# Altium PCB 5GHz.PcbDoc
Units mm, origin at the board's own origin, x right, y up, seen from the top; angles counter-clockwise.
Board outline 60.32 x 29.08 mm, 2 copper layers (Top Layer, Bottom Layer); 19 components, 17 nets, 72 pads, 0 vias.
Unrouted connection lines stored in the file: 1.
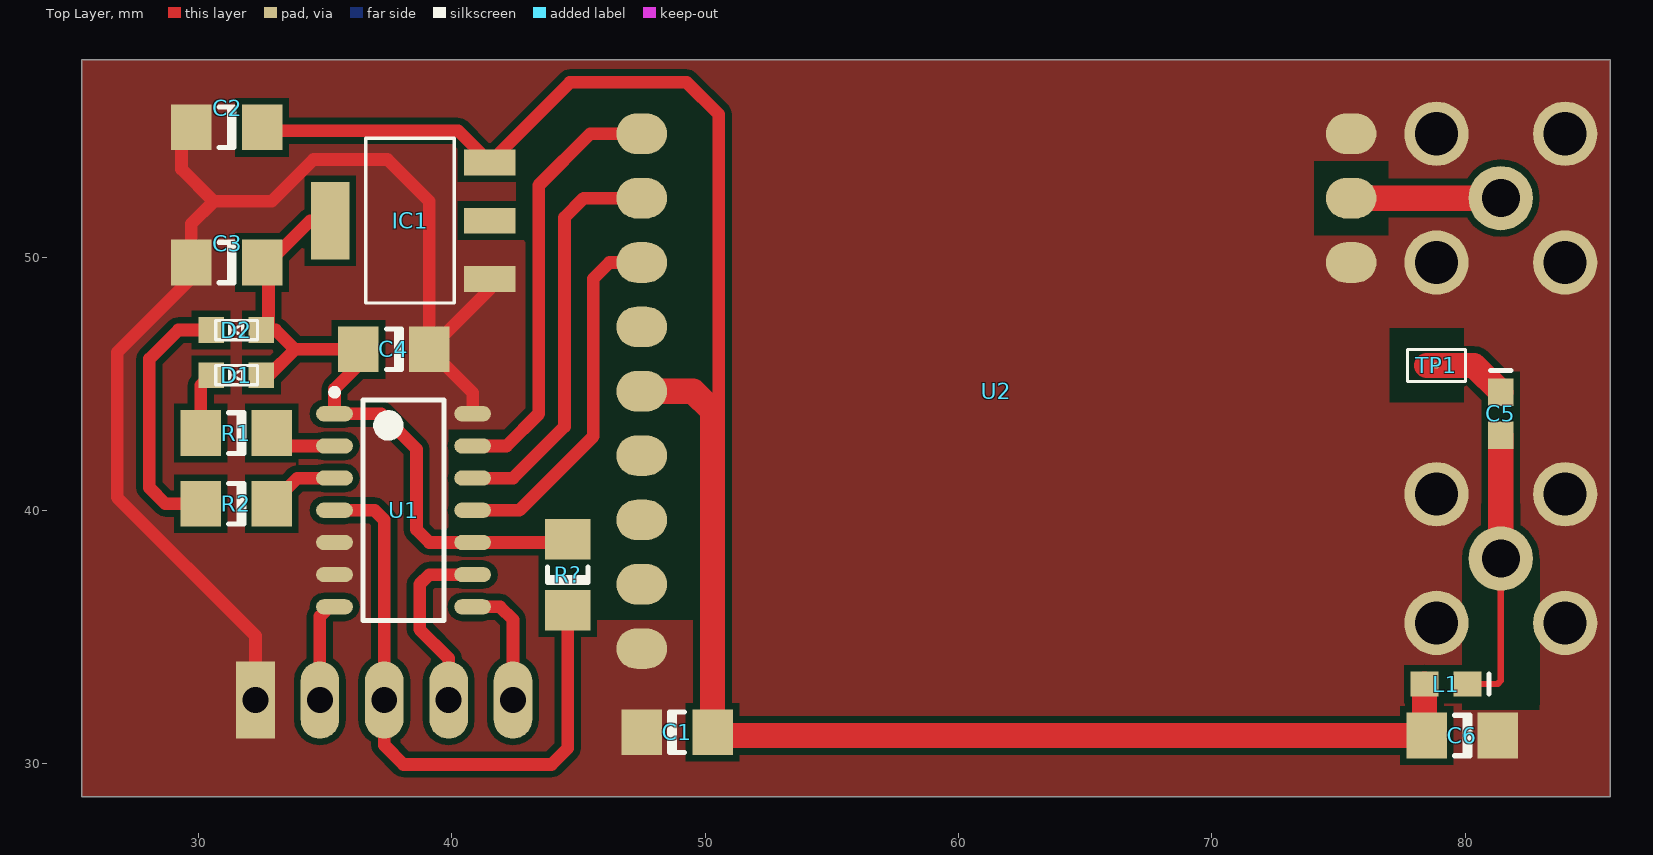
[diagram p0: Top Layer view]
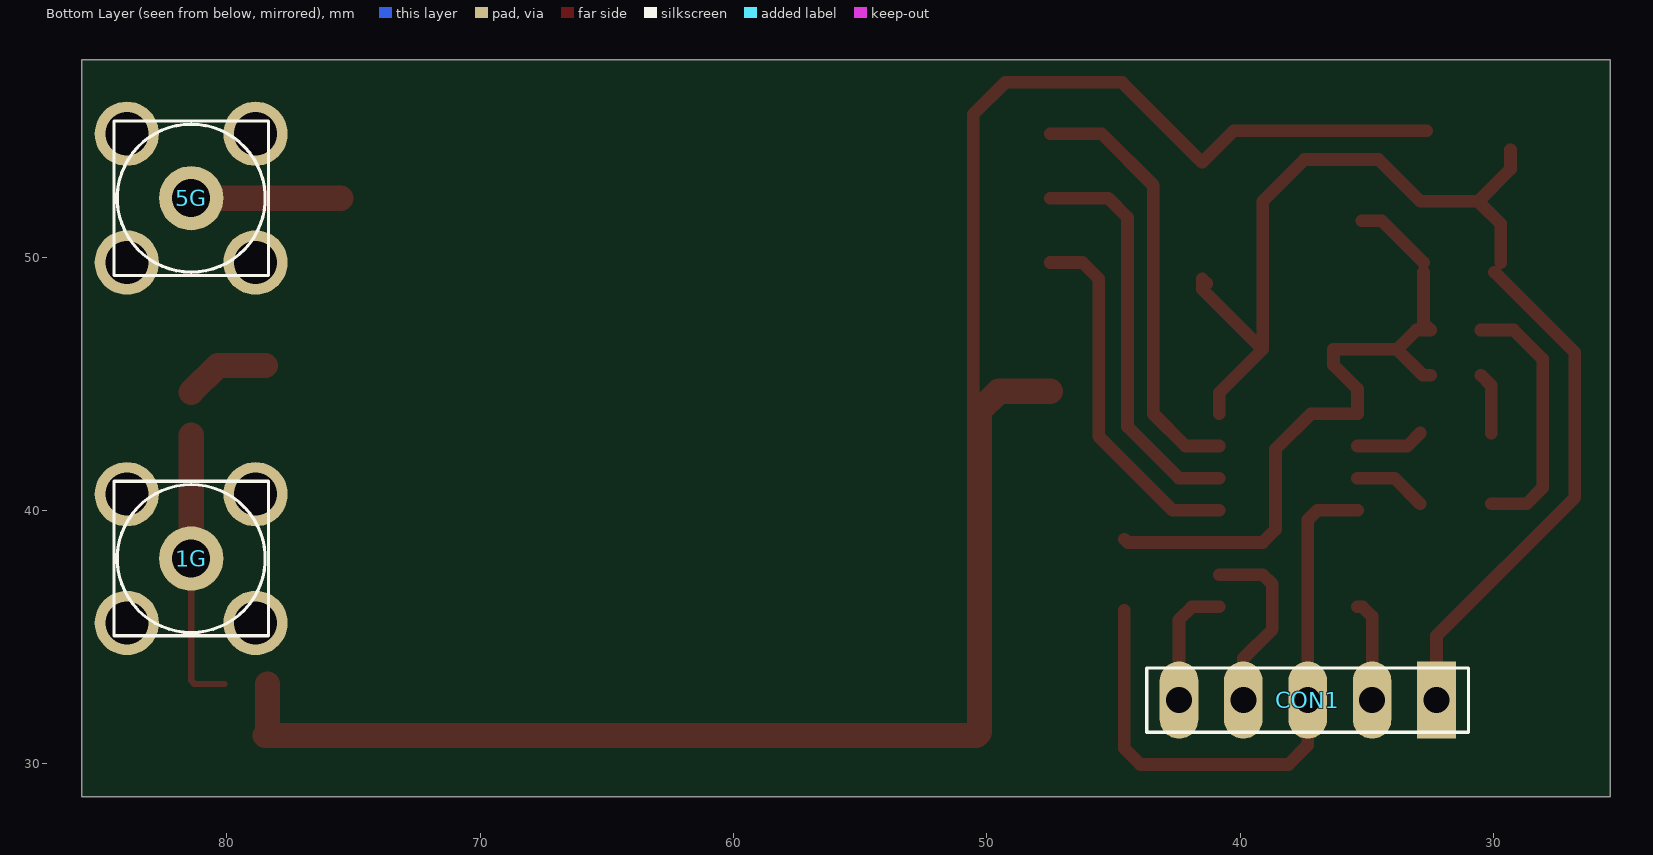
[diagram p1: Bottom Layer view, seen from below]

## Layer stack, top to bottom
Top Layer: signal copper 0.0356
Dielectric: core 0.32, FR-4, Dk 4.8
Bottom Layer: signal copper 0.0356

## Board outline
85.725,28.702 85.725,57.785 25.4,57.785 25.4,28.702

## Design rules (kind name [scope] priority, off if disabled: settings)
Clearance [All] p1: gap=0.25
PolygonConnect [All] p1: connectstyle=Direct reliefconductorwidth=0.254 reliefentries=4 polygonreliefangle="90 Angle" airgapwidth=0.254
RoutingVias [All] p1: holewidth=0.711 width=1.27 viastyle="Through Hole" minholewidth=0.711 minwidth=1.27 maxholewidth=0.711 maxwidth=1.27
SilkscreenOverComponentPads [All] p1: minsilkscreentomaskgap=0.254
SolderMaskExpansion [All] p1: expansion=0.102
Width [All] p1: maxlimit=25.4 minlimit=0.254 preferedwidth=0.5
27 further rules are at their usual default settings.

## Components (designator, comment, footprint, x,y, rotation, side; value= is the part's Value field where it differs from the comment)
1G "CON SMA" "con SMA (recht)" 81.407,38.1 r180 bottom
5G "CON SMA" "con SMA (recht)" 81.407,52.324 r180 bottom
C1 "100nF" "smd C1206" 48.895,31.242 r0 top
C2 "CSMD1206/10uF/10V" "smd C1206 polar" 31.115,55.118 r180 top
C3 "CSMD1206/10uF/10V" "smd C1206 polar" 31.115,49.784 r180 top
C4 "100nF" "smd C1206" 37.719,46.355 r180 top
C5 "CSMD603/100nF" "smd C0603_0.80" 81.407,43.815 r270 top
C6 "100nF" "smd C1206" 79.883,31.115 r180 top
CON1 "CON HDR 1x5" "hdr 1x5" 32.258,32.512 r0 bottom
D1 "HSMA-C190" "led HSMH-C190 (Avago Technologies)" 31.496,45.339 r180 top
D2 "HSMA-C190" "led HSMH-C190 (Avago Technologies)" 31.496,47.117 r180 top
IC1 "LM1117MPX-3.3" "smd SOT-223" 38.354,51.435 r90 top
L1 "RFBLOCK" "smd C0603" 79.248,33.147 r180 top
R1 "470R/1206" "smd C1206_0.55" 31.496,43.053 r180 top
R2 "470R/1206" "smd C1206_0.55" 31.496,40.259 r180 top
R? "4.7K" "smd C1206_0.55" 44.577,37.465 r90 top
TP1 "TPB-RH1x2MM/0" "TESTPOINT (pad RH 1x2mm/0)" 78.867,45.72 r180 top
U1 "ATTINY84" SOIC127P600X175-14N 38.1,40.005 r0 top
U2 "RX5808" RX5808 47.498,54.864 r180 top

## Footprints (in the part's own frame and the unit in brackets; to place one, negate y for a bottom-side part, rotate by r counter-clockwise, add the part's x,y. Pads: shape width x height; smd on the part's side, far side on the other; paste and mask are expansions set on the pad)
"con SMA (recht)" [mil]
  round 100 / inner round 60 / far side round 100 hole 59 paste+0 mask+0: 1(0,0)
  round 100 / inner round 60 / far side round 100 hole 67 paste+0 mask+0: 2(-100,100) 3(-100,-100) 4(100,-100) 5(100,100)
  silkscreen extent -120,-120 120,120
"hdr 1x5" [mil]
  rect 60x120 / inner round 60 / far side rect 60x120 hole 40 paste+0 mask+0: 1(0,0)
  oval 60x120 / inner round 60 / far side oval 60x120 hole 40 paste+0 mask+0: 2(100,0) 3(200,0) 4(300,0) 5(400,0)
  silkscreen extent -50,-50 450,50
"led HSMH-C190 (Avago Technologies)" [mil]
  rect 40x40 smd paste+0 mask+0: 1(-39,0) 2(39,0)
  silkscreen extent -33,-15 32,15
RX5808 [mm]
  oval 2x1.6 smd: 1(0,0) 2(0,2.54) 3(0,5.08) 4(0,7.62) 5(0,10.16) 6(0,12.7) 7(0,15.24) 8(0,17.78) 9(0,20.32) 10(-28,5.08) 11(-28,2.54) 12(-28,0)
"smd C0603" [mm] "Chip Capacitor; Body 1.6 x 0.8 mm (LxW typ)"
  rect 1.1x1 smd: 1(-0.85,0) 2(0.85,0)
  silkscreen extent -1.7,-0.4 -1.7,0.4
"smd C0603_0.80" [mm] "Chip Capacitor; Body 1.6 x 0.8 mm (LxW typ)"
  rect 1.1x1 smd: 1(-0.85,0) 2(0.85,0)
  silkscreen extent -1.7,-0.4 -1.7,0.4
"smd C1206" [mm] "Chip Capacitor; Body 3.2 x 1.6 mm (LxW typ)"
  rect 1.6x1.8 smd: 1(-1.4,0) 2(1.4,0)
  silkscreen extent -0.3,-0.8 0.3,0.8
"smd C1206 polar" [mm] "Chip Capacitor; Body 3.2 x 1.6 mm (LxW typ)"
  round 0.5 on Top Overlay: 0(-1.5,-1.5)
  rect 1.6x1.8 smd: 1(-1.4,0) 2(1.4,0)
  silkscreen extent -0.3,-0.8 0.3,0.8
"smd C1206_0.55" [mm] "Chip Capacitor; Body 3.2 x 1.6 mm (LxW typ)"
  rect 1.6x1.8 smd: 1(-1.4,0) 2(1.4,0)
  silkscreen extent -0.3,-0.8 0.3,0.8
"smd SOT-223" [mil]
  rect 40x80 smd paste+0 mask+0: 1(-90.55,-124.02) 2(0,-124.02) 3(90.55,-124.02)
  rect 120x60 smd paste+0 mask+0: 4(0,124.02)
  silkscreen extent -128,-69 128,69
SOIC127P600X175-14N [mm] "SOIC, 14-Leads, Body 8.65x3.90mm, Pitch 1.27mm, IPC Medium Density"
  oval 1.45x0.6 smd: 1(-2.725,3.81) 2(-2.725,2.54) 3(-2.725,1.27) 4(-2.725,0) 5(-2.725,-1.27) 6(-2.725,-2.54) 7(-2.725,-3.81) 8(2.725,-3.81) 9(2.725,-2.54) 10(2.725,-1.27) 11(2.725,0) 12(2.725,1.27) 13(2.725,2.54) 14(2.725,3.81)
  silkscreen extent -2.85,-4.35 1.6,4.78, body extent -2,-4.35 2,4.35, height 1.75
"TESTPOINT (pad RH 1x2mm/0)" [mil]
  round 10 smd paste+0 mask+0: 1(0,0)
  Top Layer region: -30,-10 -30,10 30,10 30,-10
  silkscreen extent -45,-25 45,25

## Part data
1G 5G: "SMA connector, rechtop"
C1 C4 C6: library part CSMD1206/100nF, "smd capaciteit, verp.1206, 100nF"
C2 C3: "smd capaciteit, tantalium, verp.1206, 10uF/10V"
C5: "smd capaciteit, verp.0603, 100nF"
CON1: "pcb header recht 1x5  pitch 100mil"
D1 D2: "led smd amber, Avago Techn., HSMA-C190"
IC1: "low dropout linear regulator, 3.3V 800mA, SOT-223"
L1: library part SPL603/100nH
R1 R2: "weerstand SMD1206, 470R"
R?: library part 470R/1206, "weerstand SMD1206, 470R"
TP1: "testpunt, boog-symbool, pad rechthoekig 1x2mm/0"

## Nets (pads, with @x,y where several pads share a name; then routed paths per layer and width w, separated by ;. In a path a pad name is that pad's centre, name@x,y a point inside that pad or via, vN(x,y) a via of type N, cw(c..) or ccw(c..) an arc to the next point about the centre after c; other vN are vias at no path point)
3V3: C3.1 C4.2 D1.1 D2.1 IC1.2 IC1.4 R?.2 U1.1 U1.10 | length 27.6
  Top Layer w0.5: D1.1 32.797,45.339 33.813,46.355 ; C3.1@32.769,49.403 32.769,47.399 D2.1 33.051,47.117 33.813,46.355 ; C3.1@32.769,49.784 34.42,51.435 IC1.4 ; R?.2 44.447,38.735 U1.10 39.116,38.735 38.608,39.243 38.608,42.418 37.211,43.815 U1.1 35.375,44.793 36.319,45.737 C4.2 33.813,46.355
5V: C1.2 C2.1 C6.2 IC1.3 L1.2 U2.5 | length 79.3
  Top Layer w0.5: C2.1@32.642,54.991 40.248,54.991 IC1.3 44.665,56.896 49.276,56.896 50.546,55.626 50.546,43.177 50.295,42.926 ; 49.53,44.704 49.657,44.704
  Top Layer w1: U2.5 49.53,44.704 50.295,43.939 50.295,42.926 C1.2 50.422,31.115 C6.2 78.398,31.2 L1.2
CLK: U1.11 U2.3 | length 14.4
  Top Layer w0.5: U1.11 42.672,40.005 45.593,42.926 45.593,49.149 46.228,49.784 U2.3
DATA: U1.13 U2.1 | length 17.1
  Top Layer w0.5: U1.13 42.164,42.545 43.434,43.815 43.434,52.832 45.466,54.864 U2.1
GND: 1G.2 1G.3 1G.4 1G.5 5G.2 5G.3 5G.4 5G.5 C1.1 C2.2 C3.2 C4.1 C6.1 CON1.1 IC1.1 U1.5 U1.6 U1.14 U2.9 U2.10 U2.12 | length 48.8
  Top Layer w0.5: C2.2@29.334,54.229 29.334,53.47 30.607,52.197 ; C3.2 29.715,51.305 30.607,52.197 ; C3.2@29.969,49.403 26.797,46.231 26.797,40.513 32.258,35.052 CON1.1 ; U1.14 40.825,44.649 C4.1 ; IC1.1@41.324,48.956 IC1.1 41.504,48.74 C4.1 ; 30.607,52.197 32.893,52.197 34.544,53.848 37.465,53.848 39.119,52.194 C4.1
MISO: CON1.5 U1.8 | length 5
  Top Layer w0.5: U1.8 41.91,36.195 42.418,35.687 CON1.5
MOSI: CON1.2 U1.7 | length 4
  Top Layer w0.5: CON1.2 34.798,35.814 35.179,36.195 U1.7
Net1G_1: 1G.1 C5.2 L1.1 | length 11.1
  Top Layer w0.254: L1.1 81.28,33.147 81.407,33.274 1G.1
  Top Layer w1: 1G.1 C5.2
Net5G_1: 5G.1 U2.11 | length 5.9
  Top Layer w1: U2.11 5G.1
NetC5_1: C5.1 TP1.1 | length 3.4
  Top Layer w1: 78.486,45.72 80.352,45.72 C5.1
NetD1_2: D1.2 R1.2 | length 2.5
  Top Layer w0.5: R1.2 30.096,44.93 D1.2
NetD2_2: D2.2 R2.2 | length 10.3
  Top Layer w0.5: R2.2 28.702,40.259 28.067,40.894 28.067,45.974 29.21,47.117 D2.2
NetR1_1: R1.1 U1.2 | length 2.7
  Top Layer w0.5: R1.1 33.404,42.545 U1.2
NetR2_1: R2.1 U1.3 | length 2.9
  Top Layer w0.5: R2.1 33.912,41.275 U1.3
RST: CON1.3 R?.1 U1.4 | length 24.3
  Top Layer w0.5: U1.4 36.957,40.005 37.338,39.624 CON1.3 37.338,30.734 38.1,29.972 43.942,29.972 44.577,30.607 R?.1
SCK: CON1.4 U1.9 | length 7.3
  Top Layer w0.5: CON1.4 39.878,34.163 38.735,35.306 38.735,37.084 39.116,37.465 U1.9
SEL: U1.12 U2.2 | length 16.1
  Top Layer w0.5: U1.12 42.418,41.275 44.45,43.307 44.45,51.562 45.212,52.324 U2.2
pads on no net: C2.0 C3.0 U2.4 U2.6 U2.7 U2.8

## Polygon pours and split planes (outlines as drawn)
GND on Top Layer "GNDPlane" (solid, remove dead copper, pour order 2): 85.725,57.785 85.725,28.702 25.4,28.702 25.4,57.785

## Other copper
Top Layer:
  pour cut-out: 43.427,37.983 43.427,36.947 43.437,36.957 45.72,36.957 45.72,37.973
  pour cut-out: 77.029,47.18 79.95,47.18 79.95,44.259 77.029,44.259
  pour cut-out: 74.041,53.785 76.962,53.785 76.962,50.863 74.041,50.863
  pour cut-out: 45.722,46.101 42.924,50.677 42.545,50.673 42.545,54.776 44.665,56.896 49.276,56.896 50.038,56.261 50.038,44.704 49.53,44.704 49.53,35.687 45.727,35.687
  pour cut-out: 80.645,40.259 80.645,32.385 82.169,32.385 82.169,40.259
  pour cut-out: 79.876,38.1 79.883,38.093 79.883,32.131 82.931,32.131 82.938,32.505 82.938,38.1
  pour cut-out: 39.878,43.18 42.418,43.18 42.418,39.37 39.878,39.37

## Silkscreen, mask and mechanical layers (free items; w line width, h text height)
Top Solder:
  rectangle: 77.724,45.085 79.629,46.355